# Altium PCB PCB.PcbDoc
Units mil, origin at the board's own origin, x right, y up, seen from the top; angles counter-clockwise.
Board outline 3305 x 2695 mil, 2 copper layers (Top Layer, Bottom Layer); 35 components, 32 nets, 144 pads, 29 vias.
Unrouted connection lines stored in the file: 3.
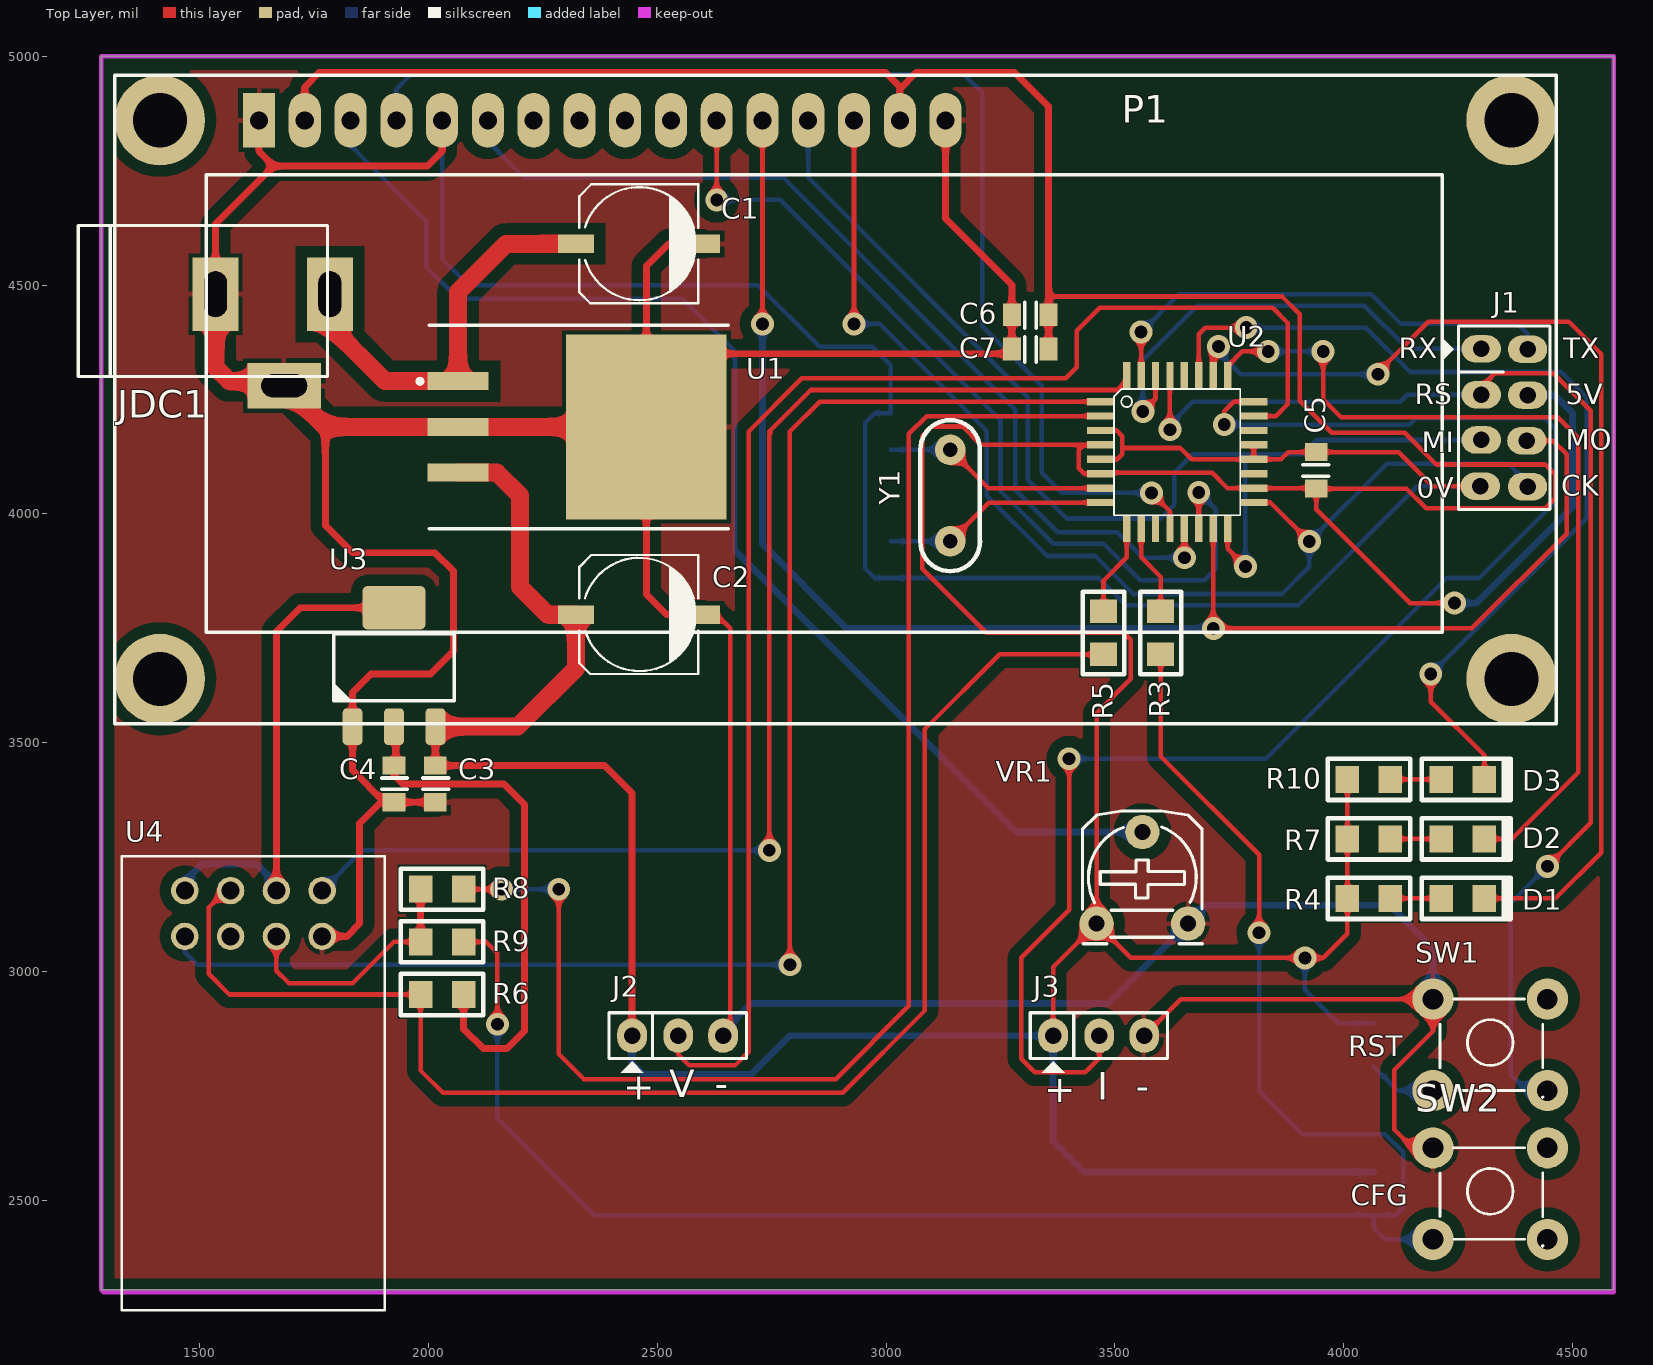
[diagram p0: Top Layer view]
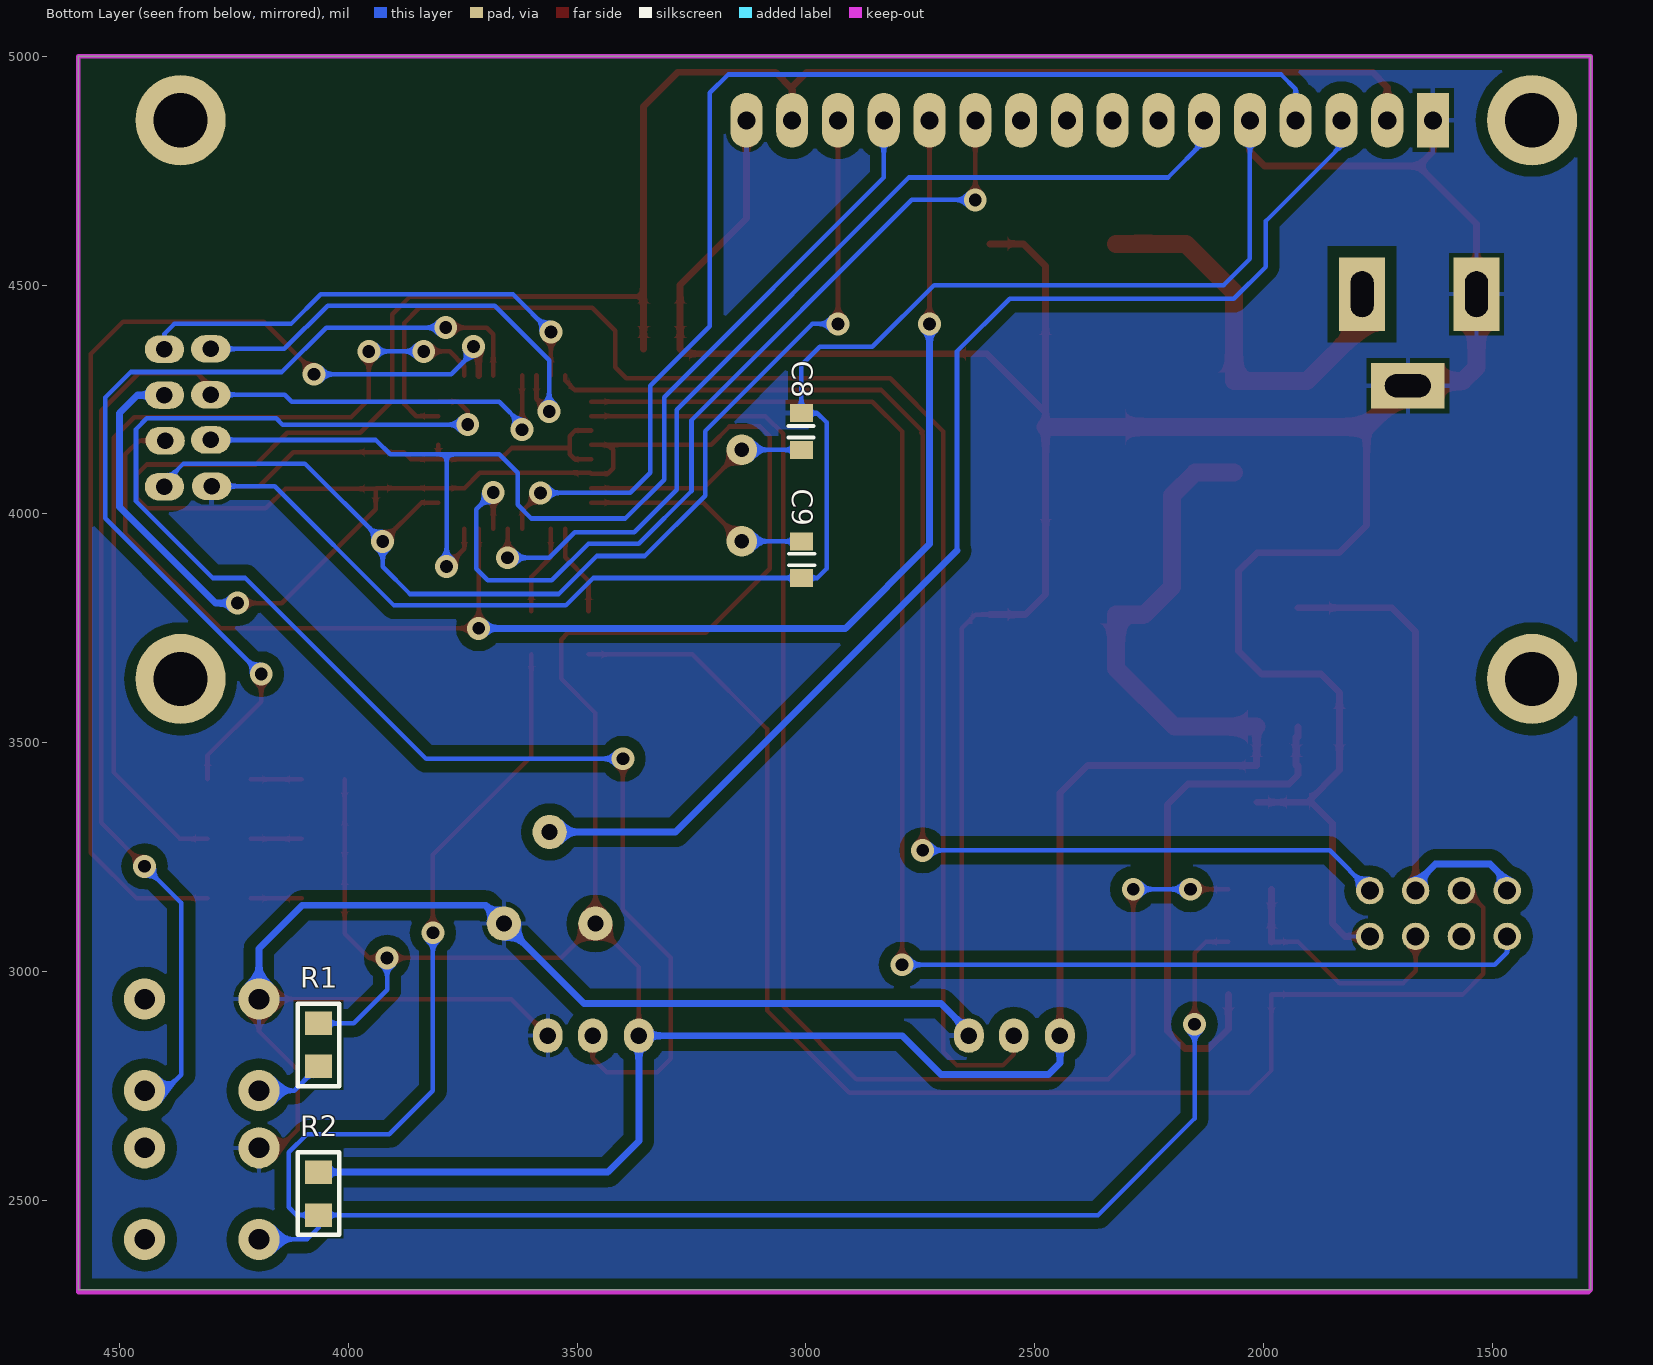
[diagram p1: Bottom Layer view, seen from below]
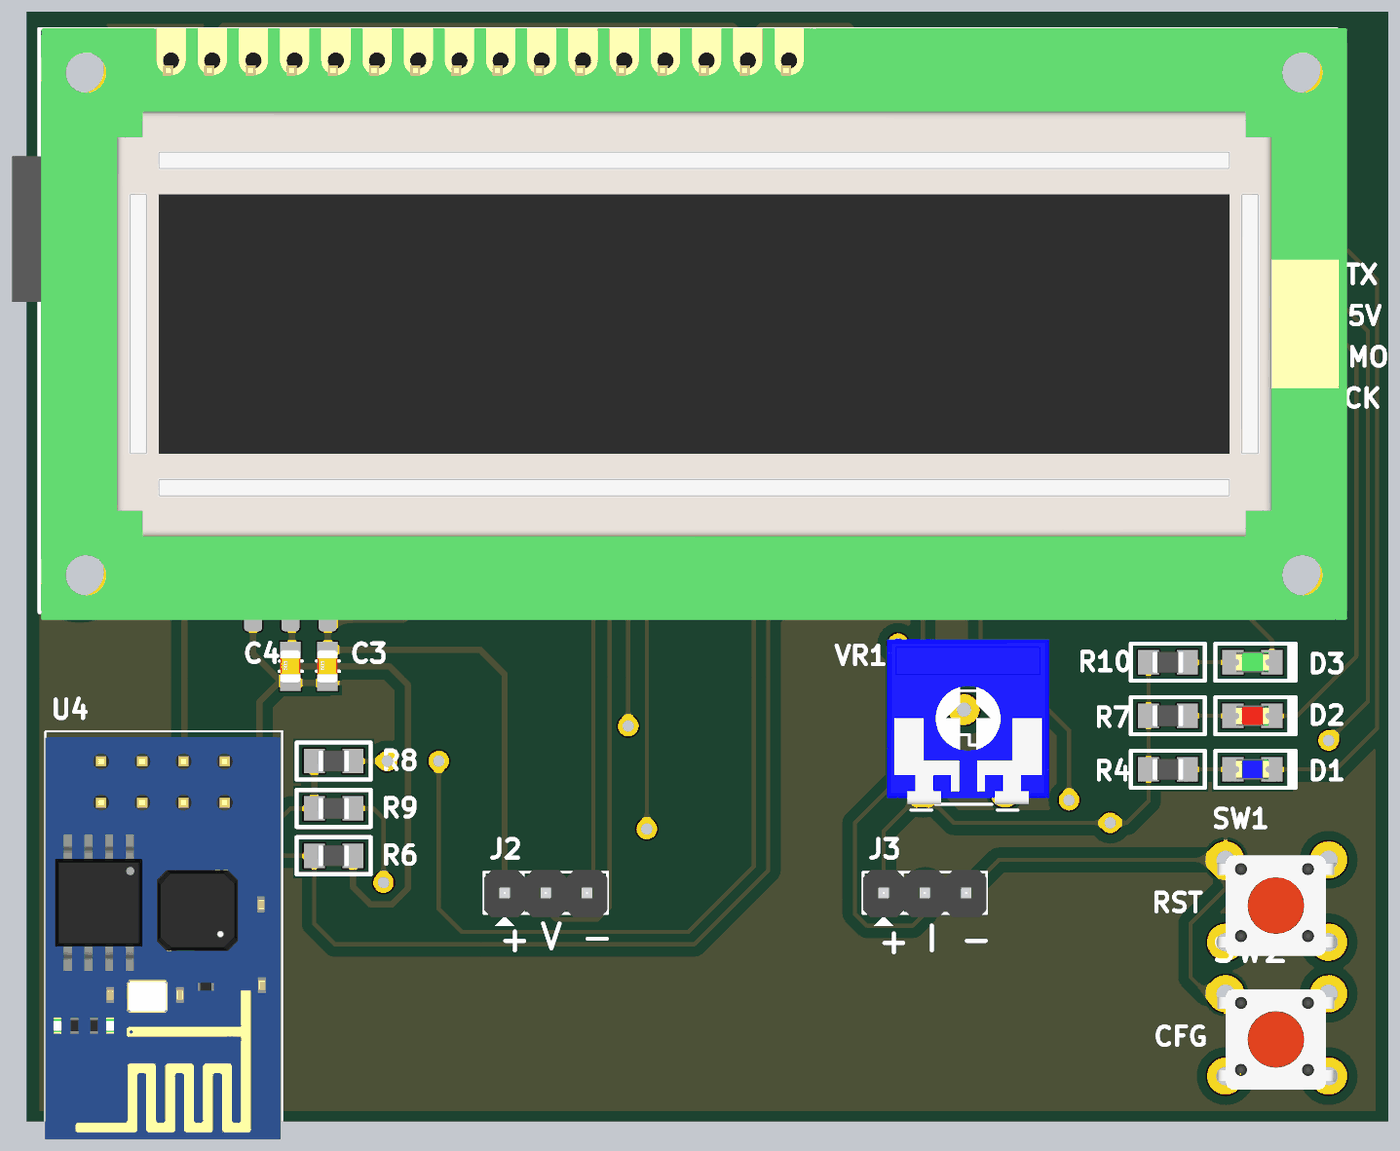
[diagram p2: 3D render of the assembled board from above, using the file's embedded part models]
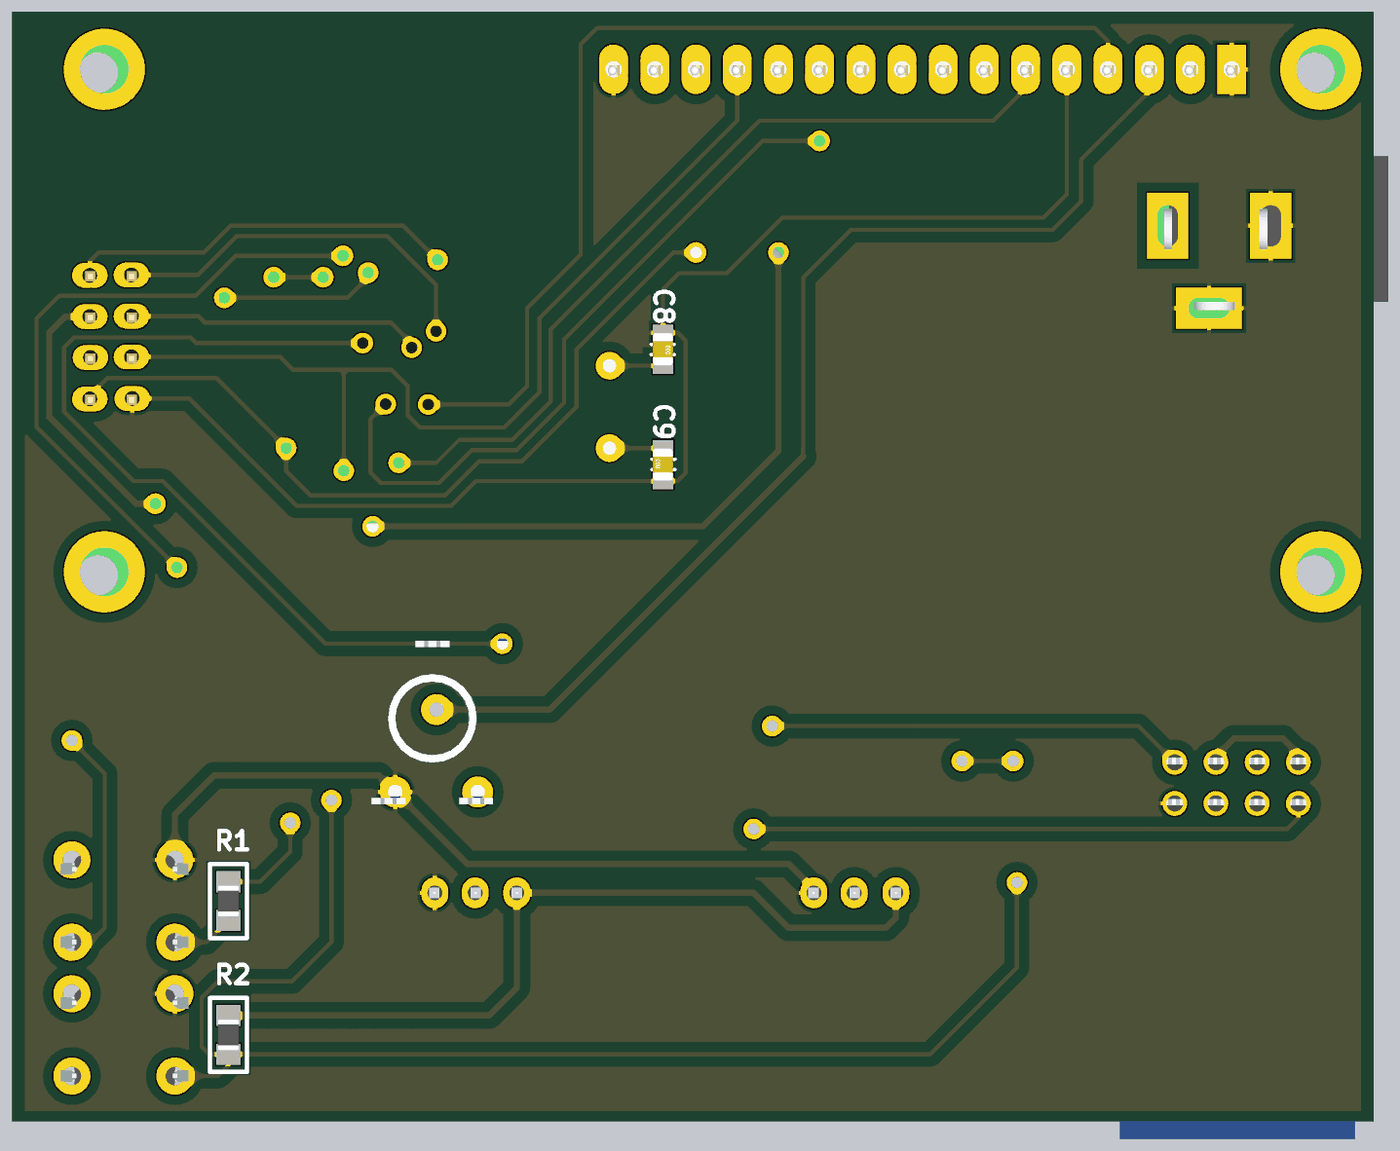
[diagram p3: 3D render of the assembled board from below, using the file's embedded part models]

## Layer stack, top to bottom
Top Solder: solder mask 0.4, Solder Resist, Dk 3.5
Top Layer: signal copper 1.4
Dielectric 1: dielectric 12.6, FR-4, Dk 4.8
Bottom Layer: signal copper 1.4
Bottom Solder: solder mask 0.4, Solder Resist, Dk 3.5

## Board outline
1285,2305 4590,2305 4590,5000 1285,5000

## Design rules (kind name [scope] priority, off if disabled: settings)
Clearance [All] p1: gap=10 ignorepadtopadclearanceinfootprint=FALSE
PolygonConnect [All] p1: connectstyle=Relief reliefconductorwidth=10 reliefentries=4 polygonreliefangle="90 Angle" airgapwidth=10
RoutingVias [All] p1: holewidth=28 width=50 viastyle="Through Hole" minholewidth=28 minwidth=50 maxholewidth=28 maxwidth=50
SolderMaskExpansion [All] p1: expansion=4
Width [All] p1: maxlimit=39.37 minlimit=10 preferedwidth=15
30 further rules are at their usual default settings.

## Components (designator, comment, footprint, x,y, rotation, side; value= is the part's Value field where it differs from the comment)
C1 "100u" CAP_SMD_6_3MM 2460,4590 r0 top
C2 "100u" CAP_SMD_6_3MM 2460,3780 r0 top
C3 "Cap Non-pol" CAP_SMD_0805 2015,3410 r90 top value=104
C4 "Cap Non-pol" CAP_SMD_0805 1925,3410 r90 top value=104
C5 "Cap Non-pol" CAP_SMD_0805 3940,4095 r270 top value=104
C6 "Cap Non-pol" CAP_SMD_0805 3315,4435 r0 top value=104
C7 "Cap Non-pol" CAP_SMD_0805 3315,4360 r0 top value=104
C8 "Cap Non-pol" CAP_SMD_0805 3010,4180 r270 bottom value=22p
C9 "Cap Non-pol" CAP_SMD_0805 3010,3900 r90 bottom value=22p
D1 "LED" "LED-0805 BLUE" 4260,3160 r0 top
D2 "LED" "LED-0805 RED" 4260,3290 r0 top
D3 "LED" "LED-0805 GREEN" 4260,3420 r0 top
J1 "Upload firmware" JP4x2 4350,4210 r270 top value="Connector 4x2"
J2 "ZMPT101" JP3 2545,2860 r0 top value=J3
J3 "ACS712" JP3 3465,2860 r0 top value=J3
JDC1 "Jac DC" DC-IN 1660,4380 r0 top
P1 "LCD16x2" LCD16x2 1629,4856 r0 top
R1 "RESISTOR" RES_SMD_0805 4065,2840 r90 bottom value=10K
R2 "RESISTOR" RES_SMD_0805 4065,2515 r90 bottom value=10K
R3 "RESISTOR" RES_SMD_0805 3600,3740 r270 top value=0R
R4 "RESISTOR" RES_SMD_0805 4055,3160 r180 top value=1K
R5 "RESISTOR" RES_SMD_0805 3475,3740 r270 top value=0R
R6 "RESISTOR" RES_SMD_0805 2030,2950 r180 top value=10K
R7 "RESISTOR" RES_SMD_0805 4055,3290 r180 top value=1K
R8 "RESISTOR" RES_SMD_0805 2030,3180 r180 top value=0R
R9 "RESISTOR" RES_SMD_0805 2030,3065 r180 top value=0R
R10 "RESISTOR" RES_SMD_0805 4055,3420 r180 top value=1K
SW1 "SW" SW4 4195,2940 r0 top value="Button chip 4 pin"
SW2 "SW" SW4 4195,2615 r0 top value="Button chip 4 pin"
U1 "LM78xx" TO-263 2064.66,4289.78 r270 top value=LM7805CT
U2 "ATmega328-AU" TQFP32A 3635,4135 r0 top
U3 "AMS1117" SOT223 1925,3666 r0 top
U4 "ESP-01" ESP8266 1585,2730 r0 top
VR1 "50K" VR 3460,3105 r0 top value="VR 10K"
Y1 "16MHz" XTAL 3140,4040 r180 top

## Footprints (in the part's own frame and the unit in brackets; to place one, negate y for a bottom-side part, rotate by r counter-clockwise, add the part's x,y. Pads: shape width x height; smd on the part's side, far side on the other; paste and mask are expansions set on the pad)
CAP_SMD_6_3MM [mm] "47uF 25V"
  rect 2x1.016 smd: 1(-3.5,0) 2(3.5,0)
  silkscreen extent -3.3,-3.3 3.3,3.3, body extent -3.79,-3.25 3.75,3.25, height 5.52
CAP_SMD_0805 [mil] "Chip Resistor; Body 2.0 x 1.3 mm (LxW typ)"
  rect 39.37x50 smd: 1(-40,0) 2(40,0)
  silkscreen extent -12,-29 13,27, body extent -39,-25 39,25, height 31
DC-IN [mil] "Jac DC input"
  rect 100x160 hole 50 slot 100 at 90 deg: 1(125,100) 2(-125,100)
  rect 160x100 hole 50 slot 100 at 0 deg: 3(25,-100)
  silkscreen extent -425,-80 120,250, body extent -410,-105 134,269, height 434
ESP8266 [mil]
  round 60 hole 39.37: 1(183,447) 2(83,447) 3(-17,447) 4(-117,447) 5(-117,347) 6(-17,347) 7(83,347) 8(183,347)
  silkscreen extent -255,-470 320,522, body extent -255,-468 316,508, height 566
JP3 [mil] "Jumper 3"
  oval 65x75 hole 36: 1(-100,0) 2(1,0) 3(99,0)
  silkscreen extent -150,-81 150,50, body extent -150,-60 150,55, height 355
JP4x2 [mil] "Connector 4x2"
  oval 60x86 hole 36: 1(-150.5,-49.5) 2(-50.5,-49.5) 3(48.5,-49.5) 4(149.5,-51.5) 5(-149.5,51.5) 6(-49.5,51.5) 7(50,50) 8(150.5,51.5)
  silkscreen extent -201,-135 201,101, body extent -197,-100 203,100, height 335
LCD16x2 [mil] "Character LCD 16x2"
  round 196.85 hole 118.11: 0(-215.54,-1216.47) 0(-215.54,4) 0(2737.22,-1216.47) 0(2737.22,4)
  rect 70x120 hole 39.37: 1(1,4)
  oval 70x120 hole 39.37: 2(101,4.02) 3(201,4) 4(301,4) 5(401,4) 6(501,4) 7(601,4) 8(701,4) 9(801,4) 10(901,4) 11(1001,4) 12(1101,4) 13(1201,4) 14(1301,4) 15(1401,4) 16(1501,4)
  round 0 all layers, no hole: ""(-215.54,4)
  silkscreen extent -314,-1315 2836,102, body extent -309,-1333 2861,104, height 788
"LED-0805 BLUE" [mm] "Chip LED; BLUE; Body 2.0 x 1.3 mm (LxW typ) [2012]"
  rect 1.3x1.5 smd: 1(-1.204,0) 2(1.204,0)
  silkscreen extent -2.29,-1.14 2.67,1.14, body extent -1.01,-0.63 1.01,0.62, height 1.1
"LED-0805 GREEN" [mm] "Chip LED; GREEN; Body 2.0 x 1.3 mm (LxW typ) [2012]"
  rect 1.3x1.5 smd: 1(-1.204,0) 2(1.204,0)
  silkscreen extent -2.29,-1.14 2.67,1.14, body extent -1.01,-0.63 1.01,0.62, height 1.1
"LED-0805 RED" [mm] "Chip LED; RED; Body 2.0 x 1.3 mm (LxW typ) [2012]"
  rect 1.3x1.5 smd: 1(-1.204,0) 2(1.204,0)
  silkscreen extent -2.29,-1.14 2.67,1.14, body extent -1.01,-0.63 1.01,0.62, height 1.1
RES_SMD_0805 [mm] "Chip Resistor; Body 2.0 x 1.3 mm (LxW typ) [2012]"
  rect 1.3x1.5 smd: 1(-1.194,0) 2(1.194,0)
  silkscreen extent -2.29,-1.14 2.29,1.14, body extent -0.95,-0.65 0.95,0.65, height 0.63
SOT223 [mm]
  round 1 on Mech15: 0(0,-0.025)
  rrect40% 1.1x2.032 smd: 1(-2.3,-3.325) 2(0,-3.325) 3(2.3,-3.325)
  rrect25% 3.5x2.413 smd: 2(0,3.275)
  silkscreen extent -3.35,-1.88 3.35,1.82, body extent -3.25,-3.53 3.25,3.47, height 1.7
SW4 [mil] "SW button 4pin, 250 x250 mil"
  round 90 hole 45: 1(0,0) 2(250,-200) 3(250,0) 4(0,-200)
  silkscreen extent 15,-215 240,0, body extent -34,-233 278,11, height 276
TO-263 [mm]
  rect 1x3.4 smd: 1(-0.006,0.009) 2(2.534,0.009) 3(5.074,0.009)
  rect 10.25x8.9 smd: 2(2.534,10.459)
  silkscreen extent -3.11,-2.23 8.19,15.01, body extent -2.46,-1.15 7.54,14.21, height 4.5
TQFP32A [mm] "Thin QFP, 32-Leads, Body 7x7mm, Pitch 0.8mm, IPC Low Density"
  rect 1.5x0.406 smd: 1(-4.225,2.8) 2(-4.225,2) 3(-4.225,1.2) 4(-4.225,0.4) 5(-4.225,-0.4) 6(-4.225,-1.2) 7(-4.225,-2) 8(-4.225,-2.8) 17(4.275,-2.8) 18(4.275,-2) 19(4.275,-1.2) 20(4.275,-0.4) 21(4.275,0.4) 22(4.275,1.2) 23(4.275,2) 24(4.275,2.8)
  rect 0.406x1.5 smd: 9(-2.775,-4.25) 10(-1.975,-4.25) 11(-1.175,-4.25) 12(-0.375,-4.25) 13(0.425,-4.25) 14(1.225,-4.25) 15(2.025,-4.25) 16(2.825,-4.25) 25(2.825,4.25) 26(2.025,4.25) 27(1.225,4.25) 28(0.425,4.25) 29(-0.375,4.25) 30(-1.175,4.25) 31(-1.975,4.25) 32(-2.775,4.25)
  silkscreen extent -3.47,-3.5 3.53,3.5, body extent -4.47,-4.5 4.53,4.5, height 1.45
VR [mil] "Resistor Variable"
  round 75 hole 35: 1(0,0) 2(100,200) 3(200,0)
  silkscreen extent -31,-44 231,246, body extent -87,-30 307,372, height 165
XTAL [mil] "Crystal, Thru-Hole; 2 Leads; Body 3.1 x 8.2 mm (Dia.xH); Solder pad 35mil"
  round 67 hole 32: 1(0,100) 2(0,-100)
  silkscreen extent -65,-165 65,165, body extent -92,-223 92,223, height 139

## Part data
C1 C2: library part Cap_Pol, "Polarized Capacitor", Capacitor Type=Tant, Manufacturer=FARNELL, Volt=25V, AEMS Code=2100110, ComponentLink1Description="Digikey Part Link", ComponentLink2Description="Open Datasheet", ComponentLink2URL=H:\LIBRARY\LIBRARY.Datasheet\, Published=13-April-2009, Publisher="Hoang Nguyen", Vendor=Digikey
C3 C4 C5 C6 C7 C8 C9: "Non-polarized Capacitor", LatestRevisionNote="Re-released for DXP Platform.", PackageReference=RAD-0.3, Publisher="Altium Limited"
D1 D2 D3: "Typical LED", LatestRevisionDate=08-Jul-2005, LatestRevisionNote="Mech Layer 1 removed.", PackageReference=LED-1, Published=8-Jun-2000, Publisher="Altium Limited"
J1: library part JP4x2, "Connector 4x2"
J2 J3: library part JP3, "Jumper 3"
JDC1: library part DCIN, "Jac DC input"
P1: library part "LCD Text"
R1 R2 R3 R4 R5 R6 R7 R8 R9 R10: "Resistor", LatestRevisionDate=17-Jul-2002, LatestRevisionNote="Re-released for DXP Platform.", PackageReference=AXIAL-0.3, Published=8-Jun-2000, Publisher="Altium Limited"
SW1 SW2: library part SW4, "Switch button 4 pin"
U1: "Regulator", Manufacturer="Fairchild Semiconductor Corporation", Output Current="Up to 1A", PSpiceTemplate="X^@REFDES %IN %OUT %GND @MODEL", Tolerance="4 %", ComponentLink1Description="Digikey Part Link", ComponentLink2Description="Open Datasheet", ComponentLink2URL=H:\LIBRARY\LIBRARY.Datasheet\LM7805.pdf, Price="2500 VND", Published=13-April-2009, Publisher="Hoang Nguyen", Vendor=Digikey, V out=5V
U2: "8-bit AVR Microcontroller, 32KB Flash, 1KB EEPROM, 2KB SRAM, 32-pin TQFP, Industrial Grade (-40°C to 85°C)"
U3: "Regulator SMD Chip", ComponentLink1Description="Digikey Part Link", ComponentLink2Description="Open Datasheet", ComponentLink2URL=H:\LIBRARY\LIBRARY.Datasheet\, Designed By="John MacTavish", Vendor=Digikey
U4: library part ESP8266-01, "ESP-12 Wi-Fi Module"
VR1: library part VR, "Var Resistor"
Y1: library part XTAL, "Crystal Oscillator", LatestRevisionDate=17-Jul-2002, LatestRevisionNote="Re-released for DXP Platform.", PackageReference=R38, Published=8-Jun-2000, Publisher="Altium Limited"

## Via types
v1: diameter 50, hole 28, Top Layer to Bottom Layer, 29 vias

## Nets (pads, with @x,y where several pads share a name; then routed paths per layer and width w, separated by ;. In a path a pad name is that pad's centre, name@x,y a point inside that pad or via, vN(x,y) a via of type N, cw(c..) or ccw(c..) an arc to the next point about the centre after c; other vN are vias at no path point)
CONFIG: R2.1 R3.2 R9.1 SW2.2 SW2.4 | length 4220.1
  Top Layer w10: R9.1 2126,3065 2151,3040 v1(2151,2885) ; R3.2 3600,3470 3815,3255 v1(3815,3085)
  Bottom Layer w10: v1(2151,2885) 2151,2679 2362,2468 R2.1 ; v1(3815,3085) 3815,2740 3910,2645 4090,2645 4130,2605 4130,2485 4113,2468 R2.1 ; SW2.4 4090,2415 4065,2440 R2.1
CURR: J3.2 U2.24 | length 3240.8
  Top Layer w10: v1(3400,3465) 3400,3135 3295,3030 3295,2810 3325,2780 3435,2780 3466,2811 J3.2 ; v1(3739,4195) 3739,4224.24 3760,4245.24 U2.24
  Bottom Layer w10: v1(3400,3465) 3830,3465 4225,3860 4296,3860 4463.76,4027.76 4463.76,4185.24 4440,4209 4157.5,4209 4143.5,4195 v1(3739,4195)
E_CONFIG: R8.1 U2.2 | length 3106.8
  Top Layer w10: R8.1 v1(2160,3180) ; v1(2285,3180) 2285,2820 2340,2765 2890,2765 3050,2925 3050,4175 3088.74,4213.74 U2.2
  Bottom Layer w10: v1(2160,3180) v1(2285,3180)
E_RST: R5.1 U2.9 | length 201.7
  Top Layer w10: R5.1 3475,3854.24 3525.76,3905 U2.9
E_RXD: U2.1 U4.5 | length 3238.9
  Top Layer w10: v1(2790,3015) 2790,4180 2855.24,4245.24 U2.1
  Bottom Layer w10: U4.5 1468,3042 1495,3015 v1(2790,3015)
E_TXD: U2.32 U4.1 | length 2768.7
  Top Layer w10: v1(2745,3265) 2745,4174 2748,4177 2745,4180 2835.73,4270.73 3505,4270.73 3525.76,4291.49 U2.32
  Bottom Layer w10: U4.1 1856,3265 v1(2745,3265)
GND: C1.2 C2.2 C3.1 C4.1 C5.1 C6.1 C7.1 C8.1 C9.1 J1.4 J2.3 J3.3 JDC1.2 JDC1.3 P1.1 P1.5 P1.16 SW1.1 SW2.1 U1.2 U2.3 U2.5 U2.20 U2.21 U3.1 U4.8 VR1.3 | length 14452.9
  Top Layer w10: C2.2 2630,3780 2660,3750 2660,2876 J2.3 ; U2.5 3505.25,4119.25 3516,4130 3516,4145 ; U2.3 3503.76,4182.24 3516,4170 3516,4145 ; J3.3 3644,2940 SW1.1 4195,2870 4110,2785 4110,2655 4150,2615 SW2.1 ; U2.21 U2.20 ; J1.4 4194.5,4060.5 4120,4135 C5.1 3878.75,4135 3863,4119.25 U2.20 ; 3516,4145 3517,4144 3642.75,4144 3667.5,4119.25 U2.20
  Top Layer w15: JDC1.2 1535,4633 1662,4760 ; P1.1 1630,4792 1662,4760 ; U4.8 1822,3077 1850,3105 1850,3324 1896,3370 C4.1@1904.45,3370 ; 1775,4190 1775,3975 1835,3915 2015,3915 2055,3875 2055,3700 2005,3650 1875,3650 1834.45,3609.45 U3.1 1834.45,3440 C4.1@1904.45,3370 ; 1976,4180 1986,4190 ; C3.1 C4.1 C4.1@1904.45,3370 ; P1.5 2030,4792 1998,4760 1662,4760 ; C2.2 2520,3780 2476.42,3823.58 2476.42,4190 U1.2@2476.42,4221.42 ; C1.2 2525,4590 2476.42,4541.42 U1.2@2476.42,4221.42 ; P1.16 3130,4645 3275,4500 C6.1 C7.1 3265,4350 2605,4350 U1.2@2476.42,4221.42
  Top Layer w39.37: JDC1.2 1535,4320 1565,4290 1675,4290 JDC1.3 1775,4190 1986,4190 2065,4190 U1.2@2476.42,4190
  Bottom Layer w10: P1.5 2030,4557 2087,4500 2720,4500 2855,4365 2970,4365 3010,4325 C8.1 2975,4220 2955,4200 2955,3880 2975,3860 C9.1 3465,3860 3525,3800 3900,3800 4160.5,4060.5 J1.4
  Bottom Layer w15: J2.3 2644,2869 2705,2930 3485,2930 VR1.3 3700,3145 4100,3145 4195,3050 SW1.1
LCD_D4: P1.11 U2.14 | length 1970.4
  Top Layer w10: v1(2630,4686) P1.11 ; U2.14 v1(3683.24,4046.76)
  Bottom Layer w10: v1(2630,4686) 2769,4686 3250,4205 3250,4050 3365,3935 3475,3935 3555,3855 3695,3855 3720,3880 3720,4010 v1(3683.24,4046.76)
LCD_D5: J1.7 P1.12 U2.15 | length 3335.2
  Top Layer w10: v1(2730,4415) P1.12 ; U2.15 3714.74,3750.26 v1(3715,3750) 4280,3750 4487,3957 4487,4130 4457,4160 J1.7
  Bottom Layer w15: v1(2730,4415) 2730,3934 2914,3750 v1(3715,3750)
LCD_D6: J1.3 P1.13 U2.16 | length 2465.3
  Top Layer w10: U2.16 3746.24,3923.76 v1(3785,3885)
  Bottom Layer w10: P1.13 2830,4735 3310,4255 3310,4075 3395,3990 3600,3990 3630,4020 3630,4090 3670,4130 3785,4130 ; v1(3785,3885) 3785,4130 ; J1.3 3939.5,4161.5 3908,4130 3785,4130
LCD_D7: J1.8 P1.14 U2.17 | length 2610.1
  Top Layer w10: v1(2930,4415) P1.14 ; U2.17 3840,4024.76 v1(3924.76,3940)
  Bottom Layer w10: v1(2930,4415) 2986,4415 3220,4181 3220,4040 3352,3908 3457,3908 3540,3825 3865,3825 3924.76,3884.76 v1(3924.76,3940) 4094.76,4110 4360,4110 4401.5,4068.5 J1.8
  Bottom Layer w15: J1.8@4368,4059.5 J1.8
LCD_EN: P1.6 U2.13 | length 2110.5
  Top Layer w10: v1(3651.75,3904.25) U2.13
  Bottom Layer w10: P1.6 2130,4814 2209,4735 2775,4735 3282.5,4227.5 3282.5,4052.5 3375,3960 3505,3960 3560.75,3904.25 v1(3651.75,3904.25)
LCD_RS: P1.4 U2.12 | length 2614.9
  Top Layer w10: v1(3580,4046) 3620.25,4005.75 U2.12
  Bottom Layer w10: P1.4 1930,4928 1962,4960 3170,4960 3210,4920 3210,4410 3340,4280 3340,4090 3384,4046 v1(3580,4046)
LCD_V0: P1.3 VR1.2 | length 2719.7
  Bottom Layer w10: P1.3 1830,4805 1995,4640 1995,4540 2065,4470 2555,4470 2670,4355 2670,3920
  Bottom Layer w15: 2670,3920 3285,3305 VR1.2
LED_CONFIG: D1.2 U2.26 | length 2403.1
  Top Layer w10: v1(4075,4305) 4075,4310 4185,4420 4492,4420 4562.66,4349.34 4562.66,3260 4462.66,3160 D1.2
  Top Layer w15: U2.26 3714.74,4354.74 v1(3726,4366)
  Bottom Layer w10: v1(3726,4366) 3726,4354 3775,4305 v1(4075,4305)
LED_ERROR: D2.2 U2.25 | length 1936.5
  Top Layer w10: U2.25 3746.24,4323 3778.24,4355 v1(3835,4355) ; v1(3955,4355) 3955,4250 3994,4211 4467.69,4211 4512.66,4166.03 4512.66,3435 4367.66,3290 D2.2
  Bottom Layer w10: v1(3835,4355) v1(3955,4355)
LED_OK: D3.2 U2.27 | length 2031
  Top Layer w10: U2.27 3683.24,4392.6 3697.65,4407 v1(3787,4407) ; v1(4190,3650) 4190,3590 4307.4,3472.6 D3.2
  Bottom Layer w10: v1(3787,4407) 4048,4407 4145,4310 4475,4310 4530.71,4254.29 4530.71,3990.71 v1(4190,3650)
NetD1_1: D1.1 R4.1 | length 110.6
  Top Layer w10: R4.1 D1.1
NetD2_1: D2.1 R7.1 | length 110.6
  Top Layer w10: R7.1 D2.1
NetD3_1: D3.1 R10.1 | length 110.6
  Top Layer w10: R10.1 D3.1
NetR3_1: R3.1 U2.10 | length 198.4
  Top Layer w10: U2.10 3557.26,3905 3600,3862.26 R3.1
NetR5_2: R5.2 R6.2 U4.3 | length 3125.3
  Top Layer w10: U4.3 1557,3177 1520,3140 1520,2995 1565,2950 R6.2 1983,2784 2032,2735 2905,2735 3085,2915 3085,3530 3248,3693 R5.2
NetR8_2: R8.2 R9.2 U4.7 | length 553.5
  Top Layer w10: U4.7 1668,3002 1695,2975 1835,2975 1925,3065 R9.2
  Top Layer w15: R9.2 R8.2
P3.3: C4.2 R6.1 U3.2 U4.2 U4.4 | length 2275.1
  Top Layer w15: U4.2 1668,3742.92 1720,3794.92 U3.2@1925,3794.92 ; U3.2@1925,3535.08 1925,3512.19 1928.98,3512.19 1928.98,3450 C4.2 1925,3430 1945,3410 2165,3410 2210,3365 2210,2870 2172,2832 2120,2832 2077,2875 R6.1
  Bottom Layer w15: U4.4 1468,3198 1505,3235 1625,3235 1668,3192 U4.2
P5.0: C2.1 C3.2 C5.2 C6.2 C7.2 J1.6 J2.1 J3.1 P1.2 P1.15 R1.2 R2.2 R4.2 R7.2 R10.2 U1.3 U2.4 U2.6 U2.18 U3.3 VR1.1 | length 13427.6
  Top Layer w10: 3355,4475 3865,4475 3904,4436 3904,4247 3974,4177 4133,4177 4202,4108 4440,4108 4462,4086 4462,4034 4440,4012 4180,4012 4137,4055 C5.2 ; J3.1 3365,3010 VR1.1 ; U2.4 3431.75,4150.75 ; R10.2 R7.2 R4.2 4008,3083 3955,3030 v1(3915,3030) 3535,3030 VR1.1 ; v1(4242,3805) 4145,3805 3940,4010 C5.2 ; 3431.75,4150.75 3207.25,4150.75 3167,4191 3100,4191 3079,4170 3079,3880 3219,3740 3520,3740 3535,3725 3535,3640 3460,3565 VR1.1 ; 3431.75,4150.75 3421,4140 3421,4100 3433.24,4087.76 U2.6 3470.92,4090 3712.26,4090 3746,4056.26 U2.18 3938.74,4056.26 C5.2
  Top Layer w15: P1.2 1730,4933 1762,4965 2998,4965 3030,4933 3030,4928 ; C3.2 C3.2@2015.55,3450 ; U3.3 C3.2@2015.55,3450 ; J2.1 2445,3390 2385,3450 C3.2@2015.55,3450 ; P1.15 3030,4928 ; C7.2 C6.2 3355,4475 3355,4890 3280,4965 3067,4965 3030,4928
  Top Layer w39.37: U3.3 2195.08,3535.08 2322.2,3662.2 C2.1 2260,3780 2200,3840 2200,4040 2150,4090 U1.3
  Bottom Layer w10: v1(3915,3030) 3915,2960 3988,2887 R1.2
  Bottom Layer w15: J2.1 2445,2800 2470,2775 2705,2775 2790,2860 J3.1 3365,2630 3433,2562 R2.2 ; v1(4242,3805) 4290,3805 4500,4015 4500,4220 4460.5,4259.5 J1.6
P9.0: C1.1 JDC1.1 U1.1 | length 895.4
  Top Layer w39.37: JDC1.1 1785,4410 1905,4290 U1.1 2065,4485 2170,4590 C1.1
RST: J1.2 R1.1 SW1.2 SW1.4 U2.29 | length 2908.5
  Top Layer w10: v1(3620.25,4184) U2.29 ; J1.2 4300.5,4277.5 4330,4307 4458,4307 4540,4225 4540,3325 v1(4445,3230)
  Bottom Layer w10: v1(3620.25,4184) 3620.25,4195.25 3670,4245 4123,4245 4138.5,4260.5 J1.2 ; R1.1 4118,2740 SW1.4 ; SW1.2 4400,2740 4365,2775 4365,3150 v1(4445,3230)
RXD: J1.1 U2.30 | length 1030.2
  Top Layer w10: v1(3561,4223.76) 3588.76,4251.51 U2.30
  Bottom Layer w10: v1(3561,4223.76) 3561,4336 3680,4455 4045,4455 4139.5,4360.5 J1.1
TXD: J1.5 U2.31 | length 1043.3
  Top Layer w10: U2.31 v1(3557.26,4397.26)
  Bottom Layer w10: v1(3557.26,4397.26) 3640,4480 4060,4480 4125,4415 4380,4415 4401.5,4393.5 J1.5
VOLT: J2.2 U2.23 | length 3185.3
  Top Layer w10: J2.2 2546,2819 2570,2795 2670,2795 2700,2825 2700,4180 2816,4296 3393,4296 3417,4320 3417,4400 3467,4450 3845,4450 3878,4417 3878,4240 3851.74,4213.74 U2.23
XTAL1: C8.2 U2.7 Y1.2 | length 493.4
  Top Layer w10: Y1.2 3223.74,4056.26 U2.7
  Bottom Layer w10: C8.2 Y1.2
XTAL2: C9.2 U2.8 Y1.1 | length 493.8
  Top Layer w10: Y1.1 3224.76,4024.76 U2.8
  Bottom Layer w10: C9.2 Y1.1
pads on no net: P1. P1.0 P1.7 P1.8 P1.9 P1.10 SW1.3 SW2.3 U2.11 U2.19 U2.22 U2.28 U3.0 U4.6

## Polygon pours and split planes (outlines as drawn)
GND on Top Layer "Top Layer-No Net" (solid, remove dead copper, pour order 2): 1285,5000 4590,5000 4590,2300 1290,2300 1285,2305
GND on Bottom Layer "Top Layer-No Net" (solid, remove dead copper, pour order 4): 1285,5000 4595,5000 4595,2305 4585,2295 1275,2295

## Keep-outs
Keep-Out Layer:
  lines w10: 1285,2305 1285,5000 4590,5000 4590,2300 1290,2300 1285,2305

## Silkscreen, mask and mechanical layers (free items; w line width, h text height)
Top Overlay:
  text "RX" at 4120,4340 h45
  text "TX" at 4480,4340 h45
  text "RS" at 4155,4240 h45
  text "5V" at 4485,4240 h45
  text "MO" at 4485,4140 h45
  text "MI" at 4170,4135 h45
  text "CK" at 4475,4040 h45
  text "0V" at 4160,4035 h45
  text "RST" at 4010,2815 h45
  text "V" at 2526,2725 h60
  text "-" at 2626,2725 h60
  text "+" at 2426,2720 h60
  text "I" at 3461,2720 h60
  text "-" at 3546,2720 h60
  text "+" at 3346,2715 h60
  text "CFG" at 4015,2490 h45